# Altium PCB IDE_44m_to_40f.PcbDoc
Units mm, origin at the board's own origin, x right, y up, seen from the top; angles counter-clockwise.
Board outline 60.07 x 36.32 mm, 2 copper layers (Top Layer, Bottom Layer), stack 1.594 mm thick; 6 components, 35 nets, 96 pads, 14 vias.
Unrouted connection lines stored in the file: 29.
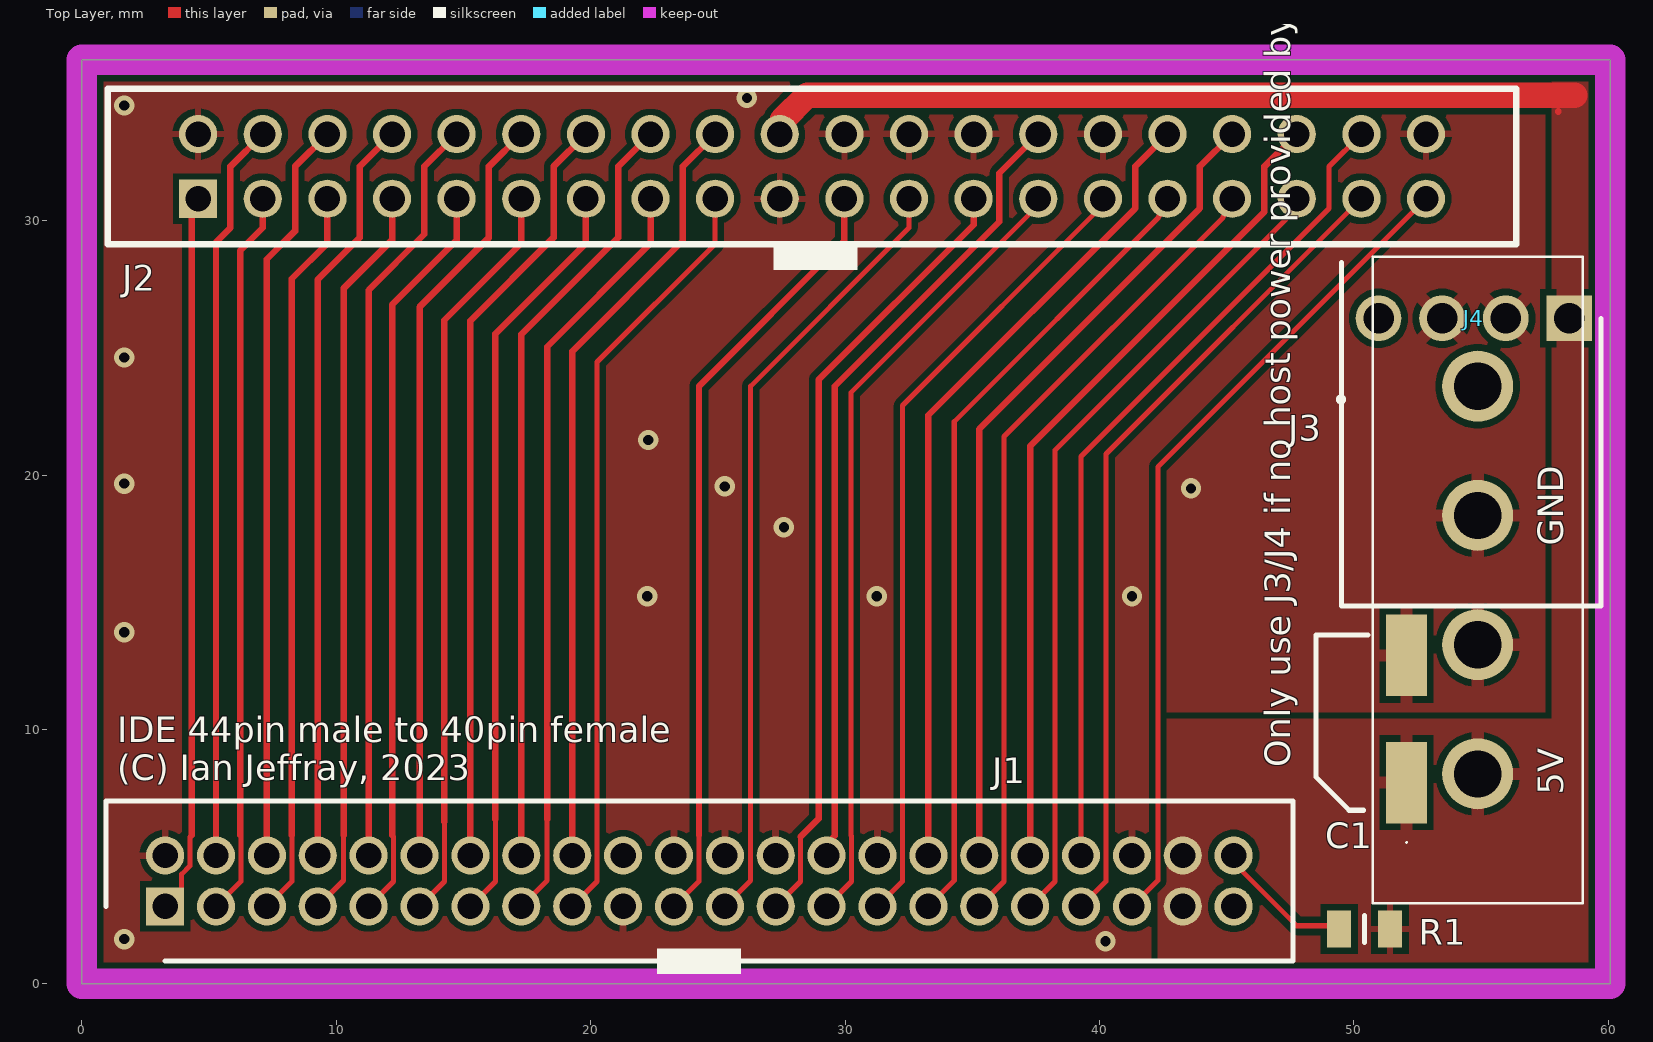
[diagram p0: Top Layer view]
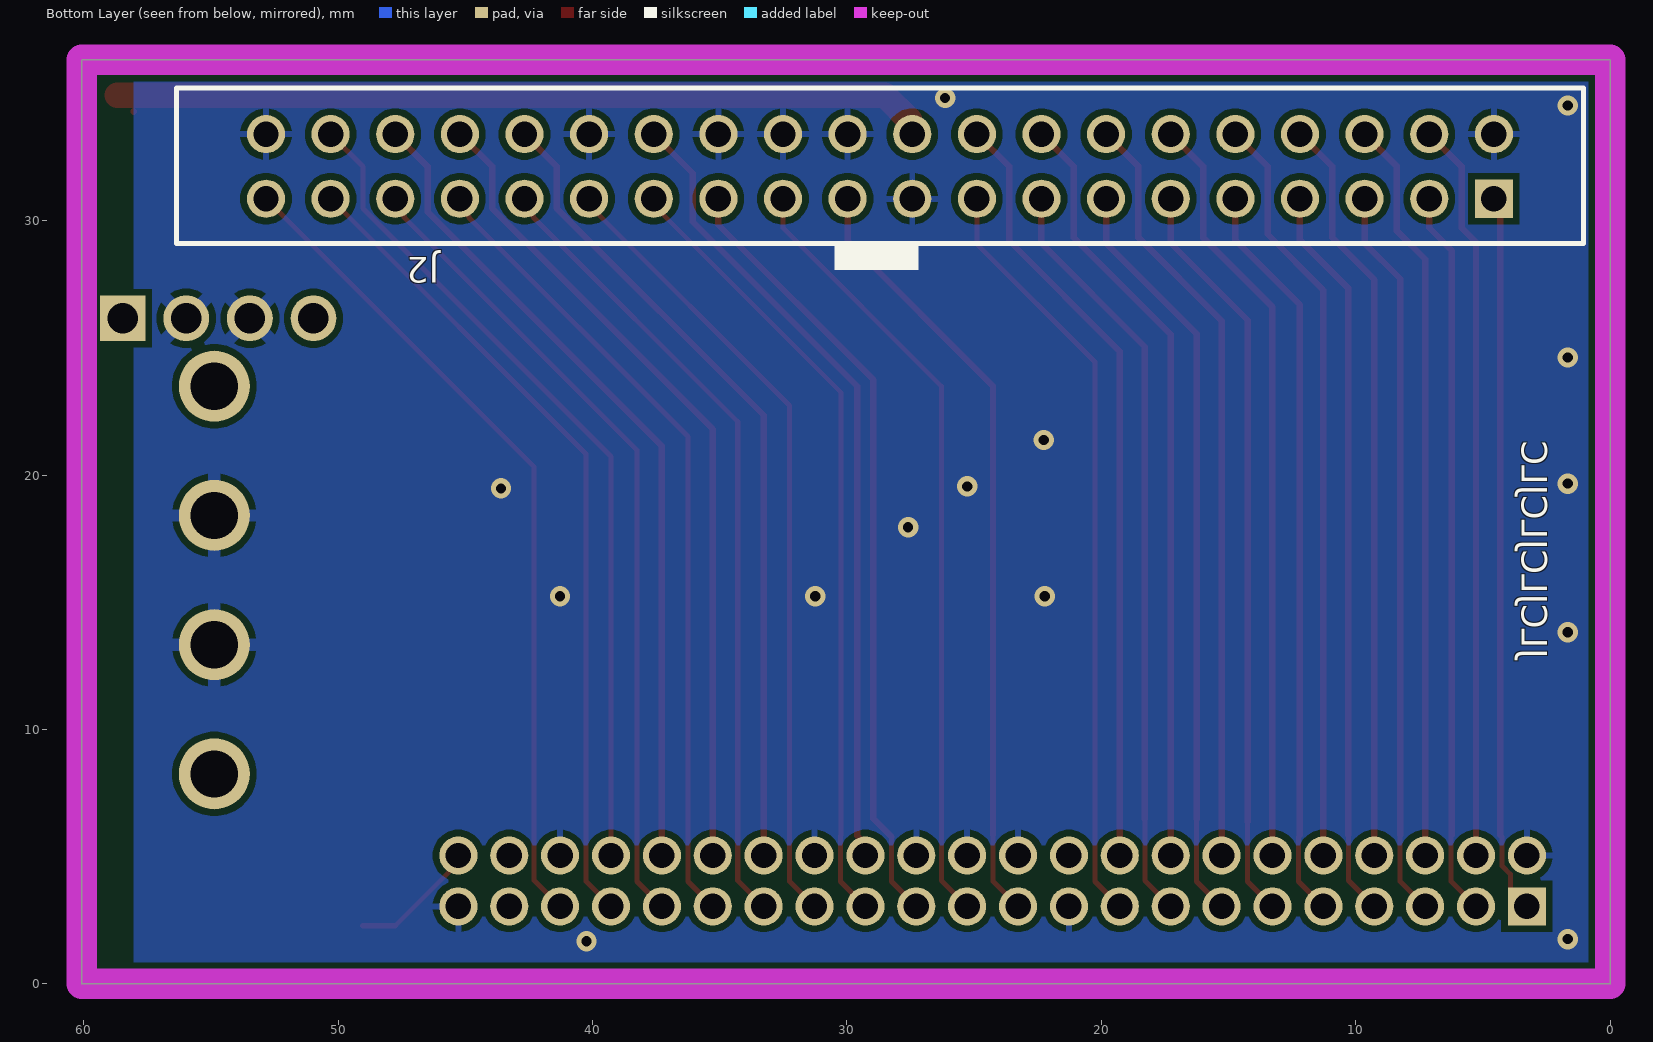
[diagram p1: Bottom Layer view, seen from below]
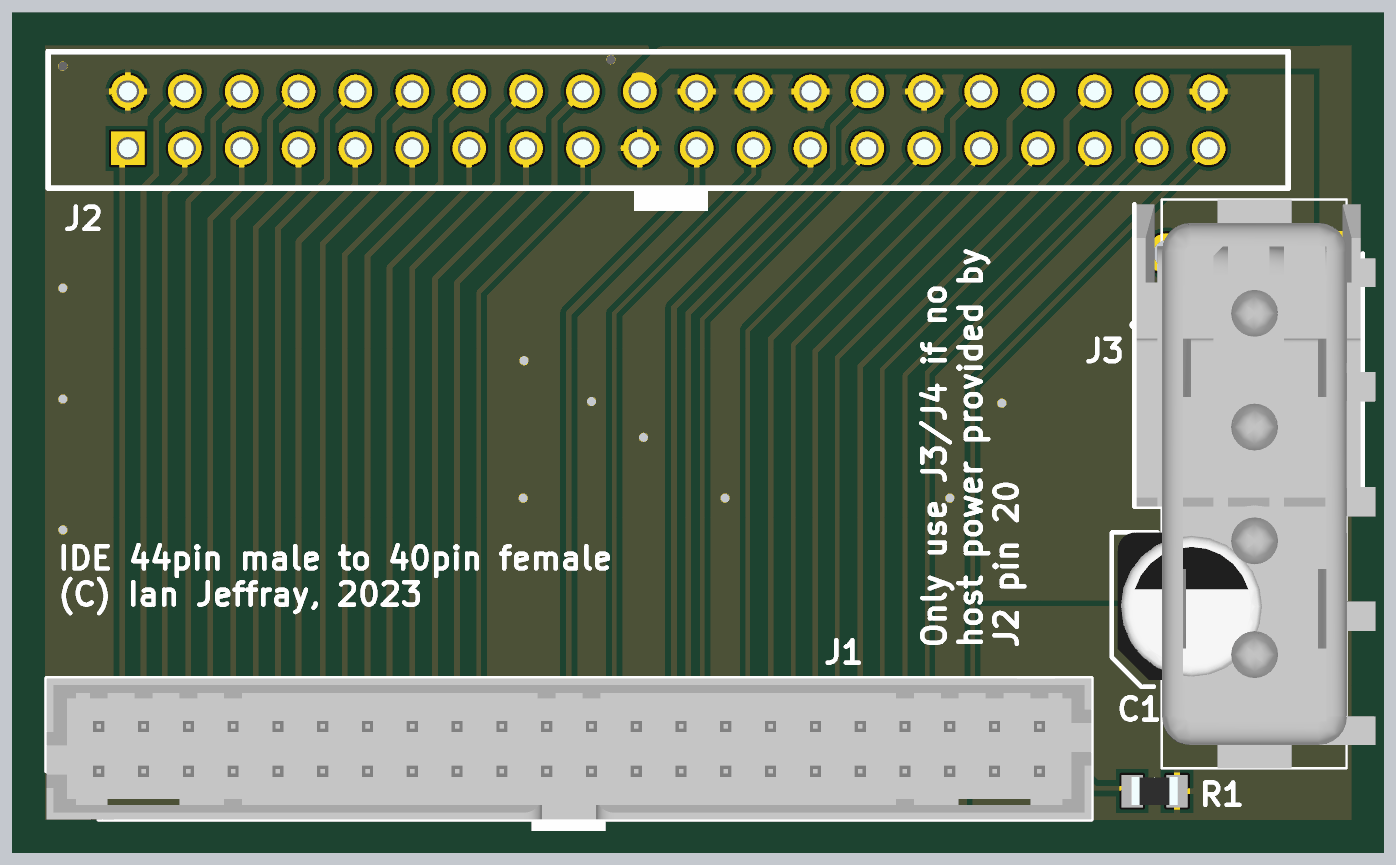
[diagram p2: 3D render of the assembled board from above, using the file's embedded part models]

## Layer stack, top to bottom
Top Solder: solder mask 0.0102, Solder Resist, Dk 3.5
Top Layer: signal copper 0.035
Dielectric 1: dielectric 1.524, FR-4, Dk 4.8
Bottom Layer: signal copper 0.035
Bottom Solder: solder mask 0.0102, Solder Resist, Dk 3.5

## Board outline
0,36.322 60.071,36.322 60.071,0 0,0

## Design rules (kind name [scope] priority, off if disabled: settings)
Clearance [All] p1: gap=0.254 ignorepadtopadclearanceinfootprint=FALSE except(0: Arc-Hole Track-Hole SMDPad-Hole THPad-Hole Via-Hole Fill-Hole Poly-Hole Region-Hole Text-Hole; 0.127: Arc-Arc Arc-Track Arc-THPad Track-Track Track-THPad)
ComponentClearance [All] p1: gap=0.127 collisioncheckmode=3 verticalgap=0.254 showdistances=FALSE
PolygonConnect [All] p1: connectstyle=Direct reliefconductorwidth=0.254 reliefentries=4 polygonreliefangle="90 Angle" airgapwidth=0.254
RoomDefinition IDE_44m_to_40f [InComponentClass('IDE_44m_to_40f')] p1: confinementstyle=ConfineIn formatcopy=TRUE lockcomponents=FALSE outline 59.817,0 64.389,0 64.389,3.937 59.817,3.937
RoutingVias [All] p1: holewidth=0.711 width=1.27 viastyle="Through Hole" minholewidth=0.711 minwidth=1.27 maxholewidth=0.711 maxwidth=1.27
SolderMaskExpansion [All] p1: expansion=0.102 istentingtop=FALSE
Width [All] p1: maxlimit=0.254 minlimit=0.127 preferedwidth=0.254 minimp=50.000000 maximp=50.000000 favimp=50.000000
29 further rules are at their usual default settings.

## Components (designator, comment, footprint, x,y, rotation, side; value= is the part's Value field where it differs from the comment)
C1 "EEE1VA470WP" EEE1AA101SP 52.07,10.414 r90 top value=47uF
J1 "87831-4420" SHDR44W55P200_2X22_4665X630X640P 3.273,3.048 r0 top value="44pin male 2mm"
J2 "8540-4500PL" 85404500PL 4.572,30.861 r180 bottom value="40pin female 2.54mm"
J3 "350211-1" 3502111 54.864,23.495 r90 top
J4 "171826-4" SHDRRA4W69P0X250_1X4_1000X1350X670P 58.467,26.162 r180 top
R1 "CRCW08054K70FKEAHP" RESC2012X50N 50.419,2.159 r0 top value=4k7

## Footprints (in the part's own frame and the unit in brackets; to place one, negate y for a bottom-side part, rotate by r counter-clockwise, add the part's x,y. Pads: shape width x height; smd on the part's side, far side on the other; paste and mask are expansions set on the pad)
3502111 [mm]
  round 2.79 hole 1.86: 1(0,0) 2(-5.08,0) 3(-10.16,0) 4(-15.24,0)
  silkscreen extent -20.32,-4.13 5.08,5.47, body extent -20.32,-5.42 5.08,4.11, height 10.13
85404500PL [mm]
  rect 1.5x1.5 hole 1: 1(0,0)
  round 1.5 hole 1: 2(0,2.54) 3(-2.54,0) 4(-2.54,2.54) 5(-5.08,0) 6(-5.08,2.54) 7(-7.62,0) 8(-7.62,2.54) 9(-10.16,0) 10(-10.16,2.54) 11(-12.7,0) 12(-12.7,2.54) 13(-15.24,0) 14(-15.24,2.54) 15(-17.78,0) 16(-17.78,2.54) 17(-20.32,0) 18(-20.32,2.54) 19(-22.86,0) 20(-22.86,2.54) 21(-25.4,0) 22(-25.4,2.54) 23(-27.94,0) 24(-27.94,2.54) 25(-30.48,0) 26(-30.48,2.54) 27(-33.02,0) 28(-33.02,2.54) 29(-35.56,0) 30(-35.56,2.54) 31(-38.1,0) 32(-38.1,2.54) 33(-40.64,0) 34(-40.64,2.54) 35(-43.18,0) 36(-43.18,2.54) 37(-45.72,0) 38(-45.72,2.54) 39(-48.26,0) 40(-48.26,2.54)
  silkscreen extent -51.78,-1.75 3.52,4.35, body extent -51.78,-1.75 3.52,4.35, height 10.9
EEE1AA101SP [mm]
  rect 3.2x1.6 smd: 1(-2.5,0) 2(2.5,0)
  silkscreen extent -4.88,-0.02 3.3,3.56, body extent 0,0 0,0
RESC2012X50N [mm]
  rect 0.95x1.45 smd: 1(-1,0) 2(1,0)
  silkscreen extent 0,-0.53 0,0.53, body extent -1.02,-0.63 1.02,0.63, height 0.5
SHDR44W55P200_2X22_4665X630X640P [mm]
  rect 1.5x1.5 hole 1: 1(0,0)
  round 1.5 hole 1: 2(0,2) 3(2,0) 4(2,2) 5(4,0) 6(4,2) 7(6,0) 8(6,2) 9(8,0) 10(8,2) 11(10,0) 12(10,2) 13(12,0) 14(12,2) 15(14,0) 16(14,2) 17(16,0) 18(16,2) 19(18,0) 20(18,2) 21(20,0) 22(20,2) 23(22,0) 24(22,2) 25(24,0) 26(24,2) 27(26,0) 28(26,2) 29(28,0) 30(28,2) 31(30,0) 32(30,2) 33(32,0) 34(32,2) 35(34,0) 36(34,2) 37(36,0) 38(36,2) 39(38,0) 40(38,2) 41(40,0) 42(40,2) 43(42,0) 44(42,2)
  silkscreen extent -2.32,-2.15 44.32,4.15, body extent -2.32,-2.15 44.33,4.15, height 6.2
SHDRRA4W69P0X250_1X4_1000X1350X670P [mm]
  rect 1.8x1.8 hole 1.2: 1(0,0)
  round 1.8 hole 1.2: 2(2.5,0) 3(5,0) 4(7.5,0)
  silkscreen extent -1.25,-2.2 8.95,11.3, body extent -1.15,-2.2 8.85,11.3, height 6.7

## Part data
C1: "Capacitor Polarised", Manufacturer_Name=Panasonic, Datasheet Link=http://industrial.panasonic.com/cdbs/www-data/pdf/RDE0000/ABA0000C1145.pdf, Height=7.8mm, Manufacturer_Part_Number=EEE1VA470WP
J1: "Drive connector", Manufacturer_Name=Molex, Mouser Part Number=538-87831-4420, Datasheet Link=https://datasheet.datasheetarchive.com/originals/distributors/Datasheets-DGA22/2095109.pdf, Height=6.4mm, Manufacturer_Part_Number=87831-4420, Mouser Price/Stock=https://www.mouser.co.uk/ProductDetail/Molex/87831-4420?qs=tYx%252BZc2nXqqGnHzye8Wn9w%3D%3D
J2: "Connector", Manufacturer_Name=3M, Mouser Part Number=517-8540-4500PL, Arrow Part Number=8540-4500PL, Arrow Price/Stock=https://www.arrow.com/en/products/8540-4500pl/3m?region=europe, Datasheet Link=https://datasheet.datasheetarchive.com/originals/distributors/Datasheets-1/DSA-266.pdf, Height=10.8mm, Manufacturer_Part_Number=8540-4500PL, Mouser Price/Stock=https://www.mouser.co.uk/ProductDetail/3M-Electronic-Solutions-Division/8540-4500PL?qs=7lbtAbU1WMyb%2F8dgNHAAlg%3D%3D
J3: "Alternate power input", Manufacturer_Name="TE Connectivity", Mouser Part Number=571-3502111, Arrow Part Number=350211-1, Arrow Price/Stock=https://www.arrow.com/en/products/350211-1/te-connectivity?region=nac, Datasheet Link=http://uk.rs-online.com/web/p/products/1638437, Height=10.29mm, Manufacturer_Part_Number=350211-1, Mouser Price/Stock=https://www.mouser.co.uk/ProductDetail/TE-Connectivity-AMP/350211-1?qs=wtYpWE7xRjkLa2TSgKGgng%3D%3D
J4: "Connector", Manufacturer_Name="TE Connectivity", Mouser Part Number=571-1718264, Arrow Part Number=171826-4, Arrow Price/Stock=https://www.arrow.com/en/products/171826-4/te-connectivity?region=nac, Datasheet Link=https://componentsearchengine.com/Datasheets/2/171826-4.pdf, Height=6.7mm, Manufacturer_Part_Number=171826-4, Mouser Price/Stock=https://www.mouser.co.uk/ProductDetail/TE-Connectivity/171826-4?qs=4hg9R9g9MDt3qYFe2l2pbA%3D%3D
R1: "4k7 Resistor", Manufacturer_Name=Vishay, Mouser Part Number=71-CRCW08054K70FKEAH, Arrow Part Number=CRCW08054K70FKEAHP, Arrow Price/Stock=https://www.arrow.com/en/products/crcw08054k70fkeahp/vishay?region=nac, Datasheet Link=http://uk.rs-online.com/web/p/products/8123574, Height=0.5mm, Manufacturer_Part_Number=CRCW08054K70FKEAHP, Mouser Price/Stock=https://www.mouser.co.uk/ProductDetail/Vishay-Dale/CRCW08054K70FKEAHP?qs=k2%2FDWSARqgEa%252B2IrxOkJMA%3D%3D

## Via types
v1: diameter 0.8, hole 0.4, Top Layer to Bottom Layer, tented both sides, 14 vias

## Nets (pads, with @x,y where several pads share a name; then routed paths per layer and width w, separated by ;. In a path a pad name is that pad's centre, name@x,y a point inside that pad or via, vN(x,y) a via of type N, cw(c..) or ccw(c..) an arc to the next point about the centre after c; other vN are vias at no path point)
A0: J1.35 J2.35 | length 32.2
  Top Layer w0.2: J1.35 38.25,4.025 38.25,20.978 47.4,30.128 47.4,30.157 47.752,30.509 J2.35
A1: J1.33 J2.33 | length 31.9
  Top Layer w0.2: J1.33 36.25,4.025 36.25,21.518 44.86,30.128 44.86,30.157 45.212,30.509 J2.33
A2: J1.36 J2.36 | length 32.7
  Top Layer w0.254: J1.36 37.273,21.144 46.482,30.353 46.482,32.131 J2.36
ACTIVEn: J1.39 J2.39 | length 32.6
  Top Layer w0.2: J1.39 42.291,4.066 42.291,20.32 J2.39
ALE: J1.28 J2.28 | length 31.8
  Top Layer w0.254: J1.28 29.511,5.286 29.511,5.74 29.591,5.82 29.591,23.495 36.056,29.96 36.056,31.865 J2.28
BD1: J1.15 J2.15 | length 29.9
  Top Layer w0.2: J1.15 18.288,4.063 18.288,6.477
  Top Layer w0.254: 18.288,6.477 18.288,25.05 22.352,29.114 J2.15
BD2: J1.13 J2.13 | length 29.7
  Top Layer w0.2: J1.13 16.256,4.031 16.256,6.477
  Top Layer w0.254: 16.256,6.477 16.256,25.558 19.812,29.114 J2.13
BD3: J1.11 J2.11 | length 29.5
  Top Layer w0.2: J1.11 14.25,4.025 14.25,6.376
  Top Layer w0.254: 14.25,6.376 14.25,26.092 17.272,29.114 J2.11
BD4: J1.9 J2.9 | length 29.3
  Top Layer w0.2: J1.9 12.25,4.025 12.25,5.784 12.192,5.842
  Top Layer w0.254: 12.192,5.842 12.192,26.701 14.732,29.241 J2.9
CS0n: J1.37 J2.37 | length 32.4
  Top Layer w0.2: J1.37 40.259,4.034 40.259,20.828 J2.37
CS1n: J1.38 J2.38 | length 32.9
  Top Layer w0.203: J1.38 39.273,20.731 49.022,30.48 49.022,32.131 J2.38
D0: J1.17 J2.17 | length 30.1
  Top Layer w0.2: J1.17 20.25,4.025 20.25,6.407 20.25,24.441 24.892,29.083 J2.17
D5: J1.7 J2.7 | length 29
  Top Layer w0.2: J1.7 10.287,4.062 10.287,5.842
  Top Layer w0.254: 10.287,5.842 10.287,27.336 12.192,29.241 J2.7
D6: J1.5 J2.5 | length 28.8
  Top Layer w0.2: J1.5 8.255,4.03 8.255,5.842
  Top Layer w0.254: 8.255,5.842 8.255,27.717 9.652,29.114 J2.5
D7: J1.3 J2.3 | length 28.6
  Top Layer w0.2: J1.3 6.25,4.025 6.25,5.815
  Top Layer w0.254: 6.223,5.842 6.223,28.829 7.112,29.718 J2.3
D8: J1.4 J2.4 | length 29.1
  Top Layer w0.254: J1.4 5.273,29.149 5.842,29.718 5.842,32.131 J2.4
D9: J1.6 J2.6 | length 29.3
  Top Layer w0.254: J1.6 7.273,28.482 8.382,29.591 8.382,32.131 J2.6
D10: J1.8 J2.8 | length 29.6
  Top Layer w0.254: J1.8 9.273,27.688 10.922,29.337 10.922,32.131 J2.8
D11: J1.10 J2.10 | length 29.8
  Top Layer w0.254: J1.10 11.273,27.275 13.462,29.464 13.462,32.131 J2.10
D12: J1.12 J2.12 | length 30
  Top Layer w0.254: J1.12 13.273,26.608 16.002,29.337 16.002,32.131 J2.12
D13: J1.14 J2.14 | length 30.2
  Top Layer w0.254: J1.14 15.273,26.068 18.542,29.337 18.542,32.131 J2.14
D14: J1.16 J2.16 | length 30.5
  Top Layer w0.254: J1.16 17.273,25.528 21.082,29.337 21.082,32.131 J2.16
D15: J1.18 J2.18 | length 30.7
  Top Layer w0.254: J1.18 19.273,24.861 23.622,29.21 23.622,32.131 J2.18
DMACKn: J1.29 J2.29 | length 31.5
  Top Layer w0.2: J1.29 32.258,4.033 32.258,22.733 40.132,30.607 J2.29
DMARQ: J1.21 J2.21 | length 30.6
  Top Layer w0.2: J1.21 24.257,4.032 24.257,5.842
  Top Layer w0.254: 24.257,5.842 24.257,23.495 29.972,29.21 J2.21
GND: C1.2 J1.2 J1.19 J1.22 J1.24 J1.26 J1.30 J1.40 J1.43 J2.2 J2.19 J2.22 J2.24 J2.26 J2.30 J2.40 J3.2 J3.3 J4.3 J4.4
  other v1: 40.235,1.675 1.666,1.76 1.666,13.825 22.225,15.24 31.242,15.24 41.275,15.24 27.595,17.953 43.597,19.477 25.273,19.558 1.666,19.667 22.261,21.382 1.666,24.62 1.666,34.526 26.138,34.822
IO_CH_RDY: J1.27 J2.27 | length 31.3
  Top Layer w0.2: J1.27 30.25,4.025 30.25,5.818 30.226,5.842 30.226,23.241 37.592,30.607 J2.27
IOCS16n: J1.32 J2.32 | length 32.2
  Top Layer w0.254: J1.32 33.273,22.351 41.402,30.48 41.402,32.131 J2.32
IORn: J1.25 J2.25 | length 31
  Top Layer w0.2: J1.25 28.25,4.025 28.25,5.786
  Top Layer w0.254: 28.25,5.786 28.956,6.492 28.956,23.749 35.052,29.845 J2.25
IOWn: J1.23 J2.23 | length 30.8
  Top Layer w0.2: J1.23 26.289,4.064 26.289,23.495 32.512,29.718 J2.23
IRQr: J1.31 J2.31 | length 31.7
  Top Layer w0.2: J1.31 34.29,4.065 34.29,22.098 42.32,30.128 42.32,30.157 42.672,30.509 J2.31
PDIAGn: J1.34 J2.34 | length 32.5
  Top Layer w0.254: J1.34 35.273,21.811 43.942,30.48 43.942,32.131 J2.34
RESETn: J1.1 J2.1 | length 28.7
  Top Layer w0.2: J1.1 3.923,3.698 3.923,4.316 4.25,4.643 4.25,5.774 4.318,5.842
  Top Layer w0.254: J1.1@3.019,3.302 J1.1 ; 4.318,5.842 4.318,30.607 J2.1
Type: J1.44 R1.1 | length 5.1
  Top Layer w0.203: J1.44 45.273,4.765 47.752,2.286 R1.1@49.038,2.286
VCC: C1.1 J1.41 J1.42 J2.20 J3.4 J4.1 J4.2 R1.2 | length 32.1
  Top Layer w0.254: 58.032,34.297 58.039,34.29
  Top Layer w1: J2.20 27.528,33.497 27.528,33.947 28.506,34.925 58.674,34.925
pads on no net: J1.20 J3.1

## Polygon pours and split planes (outlines as drawn)
GND on Top Layer "GND_L01_P002" (solid, remove dead copper, pour order 2): 0,0 60.071,0 60.071,36.322 0,36.322
VCC on Top Layer "VCC_L01_P001" (solid, remove dead copper, pour order 1): 57.785,10.414 57.785,36.322 60.071,36.322 60.071,0 42.291,0 42.291,10.414
GND on Bottom Layer "GND_L02_P000" (solid, remove dead copper, pour order 0): 0,0 58.039,0 58.039,36.322 0,36.322

## Keep-outs
Keep-Out Layer:
  the board outline again, w1.2

## Silkscreen, mask and mechanical layers (free items; w line width, h text height)
Top Overlay:
  rectangle: 27.178,28.067 30.48,29.083
  rectangle: 22.606,0.381 25.908,1.397
  lines w0.254: 1.016,29.083 56.388,29.083 56.388,35.179 1.016,35.179 1.016,29.083
  text "J2" at 1.597,27.251 h1
  text "GND" at 58.22,17.218 h1 r90
  text "Only use J3/J4 if no host power provided by J2 pin 20" at 47.498,8.509 h1 r90
  text "IDE 44pin male to 40pin female / (C) Ian Jeffray, 2023" at 1.397,8.001 h1
  text "5V" at 58.22,7.439 h1 r90
Bottom Overlay:
  rectangle: 27.178,28.067 30.48,29.083
  text "JLCJLCJLCJLC" at 3.483,12.773 h1 r90
Shape:
  the board outline again, w1.2